# Altium PCB 覆铜板转接.PcbDoc
Units mil, origin at the board's own origin, x right, y up, seen from the top; angles counter-clockwise.
Board outline 6000 x 4000 mil, 2 copper layers (Top Layer, Bottom Layer); 2 components, 8 nets, 20 pads, 0 vias.
Unrouted connection lines stored in the file: 2.
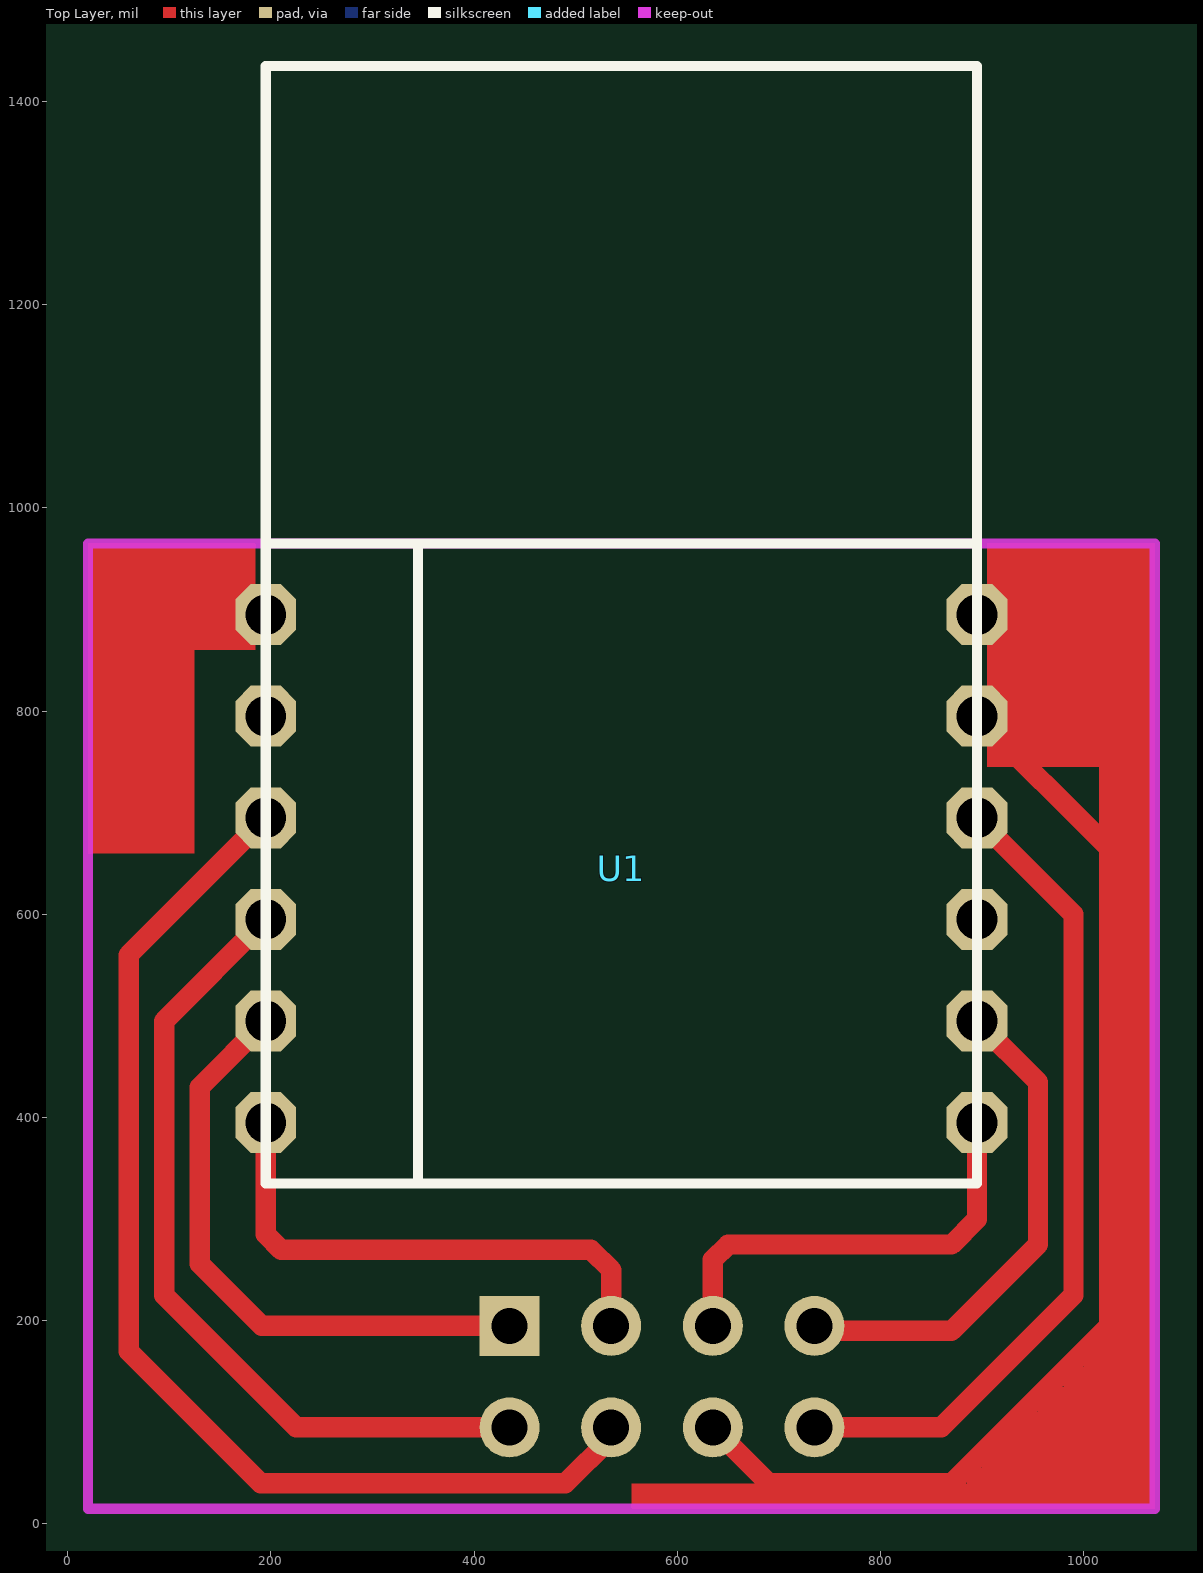
[diagram p0: Top Layer view]
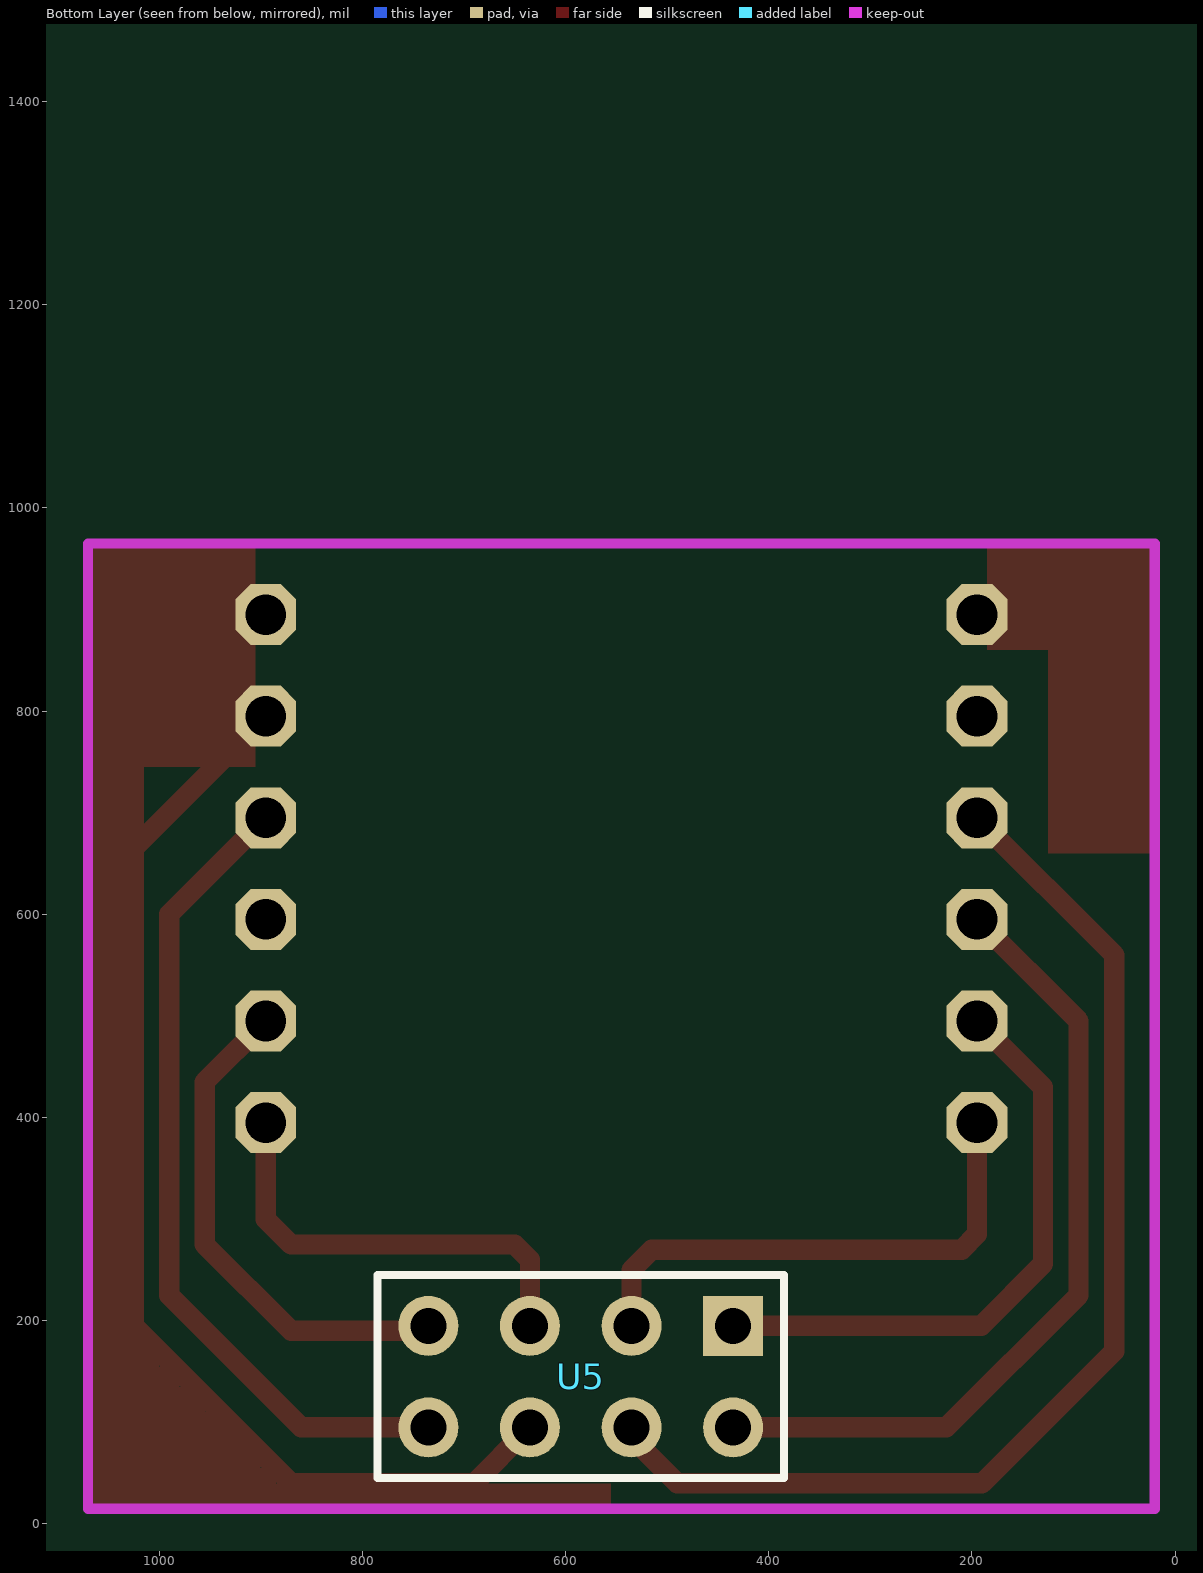
[diagram p1: Bottom Layer view, seen from below]

## Layer stack, top to bottom
Top Layer: signal copper 1.4
Dielectric: dielectric 12.6, FR-4, Dk 4.8
Bottom Layer: signal copper 1.4

## Board outline
-4175,-1050 1825,-1050 1825,2950 -4175,2950

## Design rules (kind name [scope] priority, off if disabled: settings)
Clearance [All] p1: gap=6
PolygonConnect [All] p1: connectstyle=Relief reliefconductorwidth=10 reliefentries=4 polygonreliefangle="90 Angle" airgapwidth=10
RoutingVias [All] p1: holewidth=28 width=50 viastyle="Through Hole" minholewidth=28 minwidth=50 maxholewidth=28 maxwidth=50
SolderMaskExpansion [All] p1: expansion=4
Width [All] p1: maxlimit=50 minlimit=8 preferedwidth=10 minimp=50.000000 maximp=50.000000 favimp=50.000000
28 further rules are at their usual default settings.

## Components (designator, comment, footprint, x,y, rotation, side; value= is the part's Value field where it differs from the comment)
U1 "MRF24J40" MRF24J40 195,335 r0 top
U5 "Header 4X2" HDR2X4 435,195 r0 bottom

## Footprints (in the part's own frame and the unit in brackets; to place one, negate y for a bottom-side part, rotate by r counter-clockwise, add the part's x,y. Pads: shape width x height; smd on the part's side, far side on the other; paste and mask are expansions set on the pad)
HDR2X4 [mm] "Connector; Header; 4x2 Position"
  rect 1.5x1.5 hole 0.9: 1(0,0)
  round 1.5 hole 0.9: 2(0,2.54) 3(2.54,0) 4(2.54,2.54) 5(5.08,0) 6(5.08,2.54) 7(7.62,0) 8(7.62,2.54)
  silkscreen extent -1.27,-1.27 8.89,3.81, body extent -1.27,-1.27 8.89,3.81, height 7.58
MRF24J40 [mil]
  oct 60x60 hole 40: 1(0,560) 2(0,460) 3(0,360) 4(0,260) 5(0,160) 6(0,60) 7(700,60) 8(700,160) 9(700,260) 10(700,360) 11(700,460) 12(700,560)
  silkscreen extent 0,0 700,1100

## Part data
U5: "Header, 4-Pin, Dual row"

## Nets (pads, with @x,y where several pads share a name; then routed paths per layer and width w, separated by ;. In a path a pad name is that pad's centre, name@x,y a point inside that pad or via, vN(x,y) a via of type N, cw(c..) or ccw(c..) an arc to the next point about the centre after c; other vN are vias at no path point)
3.3V: U1.2 U1.10 U5.8 | length 818.2
  Top Layer w20: U5.8 860,95 990,225 990,600 U1.10
GND: U1.1 U1.11 U1.12 U5.6 | length 1424.7
  Top Layer w20: U5.6@632.5,92.5 U5.6@637.5,92.5 ; U5.6 U5.6@637.5,92.5 ; U5.6@642.5,92.5 U5.6@637.5,92.5 ; U1.11 1025,665 ; U1.12 1025,765 1025,195 870,40 690,40 U5.6@637.5,92.5
MRF_CS: U1.8 U5.7 | length 500.1
  Top Layer w20: U5.7@735,190 870,190 955,275 955,435 U1.8
MRF_INT: U1.4 U5.2 | length 805.3
  Top Layer w20: U1.4 95,495 95,225 225,95 U5.2
MRF_SCK: U1.6 U5.3 | length 519.5
  Top Layer w20: U1.6 195,285 210,270 515,270 535,250 U5.3
MRF_SDI: U1.5 U5.1 | length 596.2
  Top Layer w20: U1.5 130,430 130,255.91 190.91,195 U5.1
MRF_SDO: U1.7 U5.5 | length 436.6
  Top Layer w20: U5.5 635,260 650,275 870,275 895,300 895,370 U1.7
MRF_WAKE: U1.3 U5.4 | length 1138.4
  Top Layer w20: U1.3 60,560 60,170 190,40 490,40 535,85 U5.4
pads on no net: U1.9

## Keep-outs
Keep-Out Layer:
  lines w10: 20,15 20,965 1070,965 1070,15 20,15

## Other copper
Top Layer:
  rectangle net GND: 20,660 125,860
  rectangle net GND: 20,860 185,965
  rectangle net GND: 555,15 895,40
  rectangle net GND: 885,15 915,55
  rectangle net GND: 900,15 930,75
  rectangle net GND: 915,15 940,90
  rectangle net GND: 930,15 955,100
  rectangle net GND: 940,15 965,110
  rectangle net GND: 955,15 975,125
  rectangle net GND: 965,15 990,135
  rectangle net GND: 980,15 1020,155
  rectangle net GND: 1000,15 1070,175
  rectangle net GND: 1015,15 1070,745
  rectangle net GND: 905,745 1070,965